# EAGLE board ATMega328-Nrf (EAGLE 6.4)

Size 50.89 x 34.29 mm. Coordinates in mm from the lower left corner, seen from the top.
Outline: 0,0 0,20.43 0.01,20.46 0.01,22.51 0,23.6 0,34.29 50.87,34.29 50.87,22.4 50.88,23.72 50.89,20.7 50.87,19.39 50.86,14.34 50.88,14.29 50.88,11.25 50.86,11.3 50.86,8.78 50.87,0 0,0
Copper layers (1*16): Top 0.0356mm / dielectric 1.5011mm / Bottom 0.0356mm
Design rules "LaenPCBOrder": minimum track width 6mil, minimum drill 13mil, track to track 6mil, track to pad 6mil, pad to pad 6mil, via to via 6mil, smd to smd 6mil, copper to edge 15mil, drill to drill 6mil, minimum pad ring 7mil, minimum via ring 7mil, stop-mask expansion 4mil, vias tented up to drill 0mil, thermal gap 10mil

## Footprints (pad centres in the part's own frame; a part is rotated, then mirrored left to right if it is on the bottom)
C025-025X050 = drill 0.813 octagon: 1 -1.27,0; 2 1.27,0
E2-5 = drill 0.813 pad 1.27: + -1.016,0 | drill 0.813 pad 1.27 octagon: - 1.016,0
UX60-MB-5S8 = smd 2 x 0.5: 1 8.65,1.6; 2 8.65,0.8; 3 8.65,0; 4 8.65,-0.8; 5 8.65,-1.6 | drill 0.8 long: M1 3.1,-3.65; M2 3.1,3.65; M3 8.4,3.65; M4 8.4,-3.65 | hole 0.9: 6.4,-1.75; 6.4,1.75
2,8 = hole 2.8: 0,0
TO220V = drill 1.016 long: 1 -2.54,-2.54; 2 0,-2.54; 3 2.54,-2.54
SOT23-5 = smd 0.6 x 1.2: 1 -0.95,-1.306; 2 0,-1.306; 3 0.95,-1.306; 4 0.95,1.306; 5 -0.95,1.306
6410-02 = drill 1.016 long: 1 1.27,0; 2 -1.27,0
PDIP-T28 = drill 0.813 pad 1.2: 1 -16.51,-3.81; 2 -13.97,-3.81; 3 -11.43,-3.81; 4 -8.89,-3.81; 5 -6.35,-3.81; 6 -3.81,-3.81; 7 -1.27,-3.81; 8 1.27,-3.81; 9 3.81,-3.81; 10 6.35,-3.81; 11 8.89,-3.81; 12 11.43,-3.81; 13 13.97,-3.81; 14 16.51,-3.81; 15 16.51,3.81; 16 13.97,3.81; 17 11.43,3.81; 18 8.89,3.81; 19 6.35,3.81; 20 3.81,3.81; 21 1.27,3.81; 22 -1.27,3.81; 23 -3.81,3.81; 24 -6.35,3.81; 25 -8.89,3.81; 26 -11.43,3.81; 27 -13.97,3.81; 28 -16.51,3.81
LED5MM = drill 0.813 octagon: A -1.27,0; K 1.27,0
1,6/0,8 = drill 0.813 pad 1.6 octagon: 1 0,0
R-5 = drill 0.813 pad 1.6 octagon: 1 -2.54,0; 2 2.54,0
HC18U-V = drill 0.813: 1 -2.54,0; 2 2.54,0

## Placement (x,y rotation side)
C1  [C025-025X050]  23.77,14.45 0 top
C2  [C025-025X050]  28.09,11.91 180 top
C3  [C025-025X050]  33.43,11.91 180 top
C4  [E2-5]  9.8,3.89 90 top
C5  [C025-025X050]  16.66,5.82 0 top
C6  [C025-025X050]  16.66,2.26 0 top
E$1  [UX60-MB-5S8]  0,10.92 0 top
E$2  [2,8]  5.1,29.18 0 top
E$3  [TO220V]  33.27,5.33 270 top
E$4  [SOT23-5]  3.81,3.81 0 top
E$5  [6410-02]  24.38,4.06 180 top
E$14  [2,8]  45.68,5.22 0 top
IC1  [PDIP-T28]  25.57,20.49 0 top
LED1  [LED5MM]  40.72,12.24 0 top
LED2  [LED5MM]  47.07,12.24 0 top
PRG1  [1,6/0,8]  48.49,16.36 90 top
PRG2  [1,6/0,8]  2.77,22.96 90 top
PRG3  [1,6/0,8]  48.49,18.9 90 top
PRG4  [1,6/0,8]  45.95,18.9 90 top
PRG5  [1,6/0,8]  48.49,21.44 90 top
PRG6  [1,6/0,8]  45.95,21.44 90 top
PRG7  [1,6/0,8]  2.77,17.88 90 top
PRG8  [1,6/0,8]  2.77,20.42 90 top
PRG9  [1,6/0,8]  48.49,30.33 90 top
PRG10  [1,6/0,8]  45.95,27.79 90 top
PRG11  [1,6/0,8]  45.95,30.33 90 top
PRG12  [1,6/0,8]  48.49,25.25 90 top
PRG13  [1,6/0,8]  48.49,27.79 90 top
PRG14  [1,6/0,8]  45.95,25.25 90 top
PRG15  [1,6/0,8]  48.49,32.87 90 top
PRG16  [1,6/0,8]  45.95,32.87 90 top
PRG17  [1,6/0,8]  42.14,31.85 90 top
PRG18  [1,6/0,8]  39.6,31.85 90 top
PRG19  [1,6/0,8]  37.06,31.85 90 top
PRG20  [1,6/0,8]  34.52,31.85 90 top
PRG21  [1,6/0,8]  31.98,31.85 90 top
PRG22  [1,6/0,8]  42.14,26.52 90 top
PRG23  [1,6/0,8]  39.6,26.52 90 top
PRG24  [1,6/0,8]  37.06,26.52 90 top
PRG25  [1,6/0,8]  34.52,26.52 90 top
PRG26  [1,6/0,8]  31.98,26.52 90 top
PRG27  [1,6/0,8]  29.44,31.85 90 top
PRG28  [1,6/0,8]  26.9,31.85 90 top
PRG29  [1,6/0,8]  24.36,31.85 90 top
PRG30  [1,6/0,8]  21.82,31.85 90 top
PRG31  [1,6/0,8]  19.28,31.85 90 top
PRG32  [1,6/0,8]  29.44,26.52 90 top
PRG33  [1,6/0,8]  26.9,26.52 90 top
PRG34  [1,6/0,8]  24.36,26.52 90 top
PRG35  [1,6/0,8]  21.82,26.52 90 top
PRG36  [1,6/0,8]  19.28,26.52 90 top
PRG37  [1,6/0,8]  45.95,16.36 90 top
PRG38  [1,6/0,8]  16.74,31.85 90 top
PRG39  [1,6/0,8]  14.2,31.85 90 top
PRG40  [1,6/0,8]  11.66,31.85 90 top
PRG41  [1,6/0,8]  9.12,31.85 90 top
PRG42  [1,6/0,8]  16.74,26.52 90 top
PRG43  [1,6/0,8]  14.2,26.52 90 top
PRG44  [1,6/0,8]  11.66,26.52 90 top
PRG45  [1,6/0,8]  9.12,26.52 90 top
R1  [R-5]  16.74,14.43 180 top
R2  [R-5]  16.74,10.36 0 top
R3  [R-5]  16.74,8.33 0 top
R4  [R-5]  16.74,12.4 180 top
XTAL1  [HC18U-V]  30.81,13.79 180 top

## Library data of the parts
C1-C3 C5 C6 = resistor
C4 = rcl
E$1 = con-hirose
E$2 E$14 = holes
E$3 E$4 = linear
E$5 = con-molex
IC1 = texas
LED1 LED2 = led
PRG1-PRG45 = wirepad
R1-R4 = discrete
XTAL1 = crystal

## Nets
S$2: C1.2 C2.2 C3.2 C4.- C5.2 C6.2 E$1.5 E$3.1 E$4.2 E$5.2 IC1.8 LED1.K PRG6.1 PRG12.1 PRG33.1 R3.2
S$3: E$4.1 LED2.K
S$4: IC1.26 PRG39.1
S$5: IC1.13 PRG23.1 R4.1
S$6: C2.1 IC1.9 PRG32.1 XTAL1.2
S$7: C3.1 IC1.10 PRG26.1 XTAL1.1
S$8: IC1.1 PRG5.1 PRG45.1 R1.2
S$9: IC1.16 PRG18.1
S$10: C1.1 C4.+ E$3.2 IC1.7 PRG14.1 PRG34.1 R1.1
S$11: IC1.15 PRG10.1 PRG17.1
S$14: IC1.14 PRG13.1 PRG22.1
S$16: IC1.4 PRG42.1
S$17: IC1.28 PRG41.1
S$18: IC1.5 PRG36.1
S$19: IC1.27 PRG40.1
S$20: E$3.3 PRG8.1
S$21: IC1.2 PRG44.1
S$22: LED1.A R4.2
S$23: IC1.3 PRG43.1
S$24: IC1.6 PRG35.1
S$25: IC1.11 PRG25.1
S$26: IC1.12 PRG24.1
S$27: IC1.25 PRG38.1
S$28: IC1.24 PRG31.1
S$29: IC1.23 PRG30.1
S$30: IC1.22 PRG29.1
S$31: IC1.21 PRG28.1
S$32: IC1.20 PRG27.1
S$33: LED2.A R2.2
S$35: C5.1 E$1.1 E$4.4 R2.1
S$36: E$4.5 R3.1
S$37: IC1.19 PRG3.1 PRG9.1 PRG21.1
S$38: IC1.17 PRG4.1 PRG11.1 PRG19.1
S$39: IC1.18 PRG1.1 PRG15.1 PRG20.1
S$43: C6.1 E$4.3 E$5.1 PRG7.1

## Tracks (layer width: path | path; a pad name or v marks a point on that pad's centre or on a via)
S$2  (15 unrouted)
S$3  (1 unrouted)
S$4  (1 unrouted)
S$5  (2 unrouted)
S$6  (3 unrouted)
S$7  (3 unrouted)
S$8  (3 unrouted)
S$9  (1 unrouted)
S$10  (6 unrouted)
S$11  (2 unrouted)
S$14  (2 unrouted)
S$16  (1 unrouted)
S$17  (1 unrouted)
S$18  (1 unrouted)
S$19  (1 unrouted)
S$20  (1 unrouted)
S$21  (1 unrouted)
S$22  (1 unrouted)
S$23  (1 unrouted)
S$24  (1 unrouted)
S$25  (1 unrouted)
S$26  (1 unrouted)
S$27  (1 unrouted)
S$28  (1 unrouted)
S$29  (1 unrouted)
S$30  (1 unrouted)
S$31  (1 unrouted)
S$32  (1 unrouted)
S$33  (1 unrouted)
S$35  (3 unrouted)
S$36  (1 unrouted)
S$37  (3 unrouted)
S$38  (3 unrouted)
S$39  (3 unrouted)
S$43  (3 unrouted)

## Text on the board
tNames: NRF24 | ATmega328 | PWRSW | ICSP | 16MHz | 1 | 4.7K | 0.1uF | 330 | + | + | 330 | 22pF | 22pF | PD7 | CHG | 2K | + | 4.7uF | MCP73831 | 100uF | 4.7uF | VREG